# EAGLE board mb01-merge (EAGLE 7.7.0)
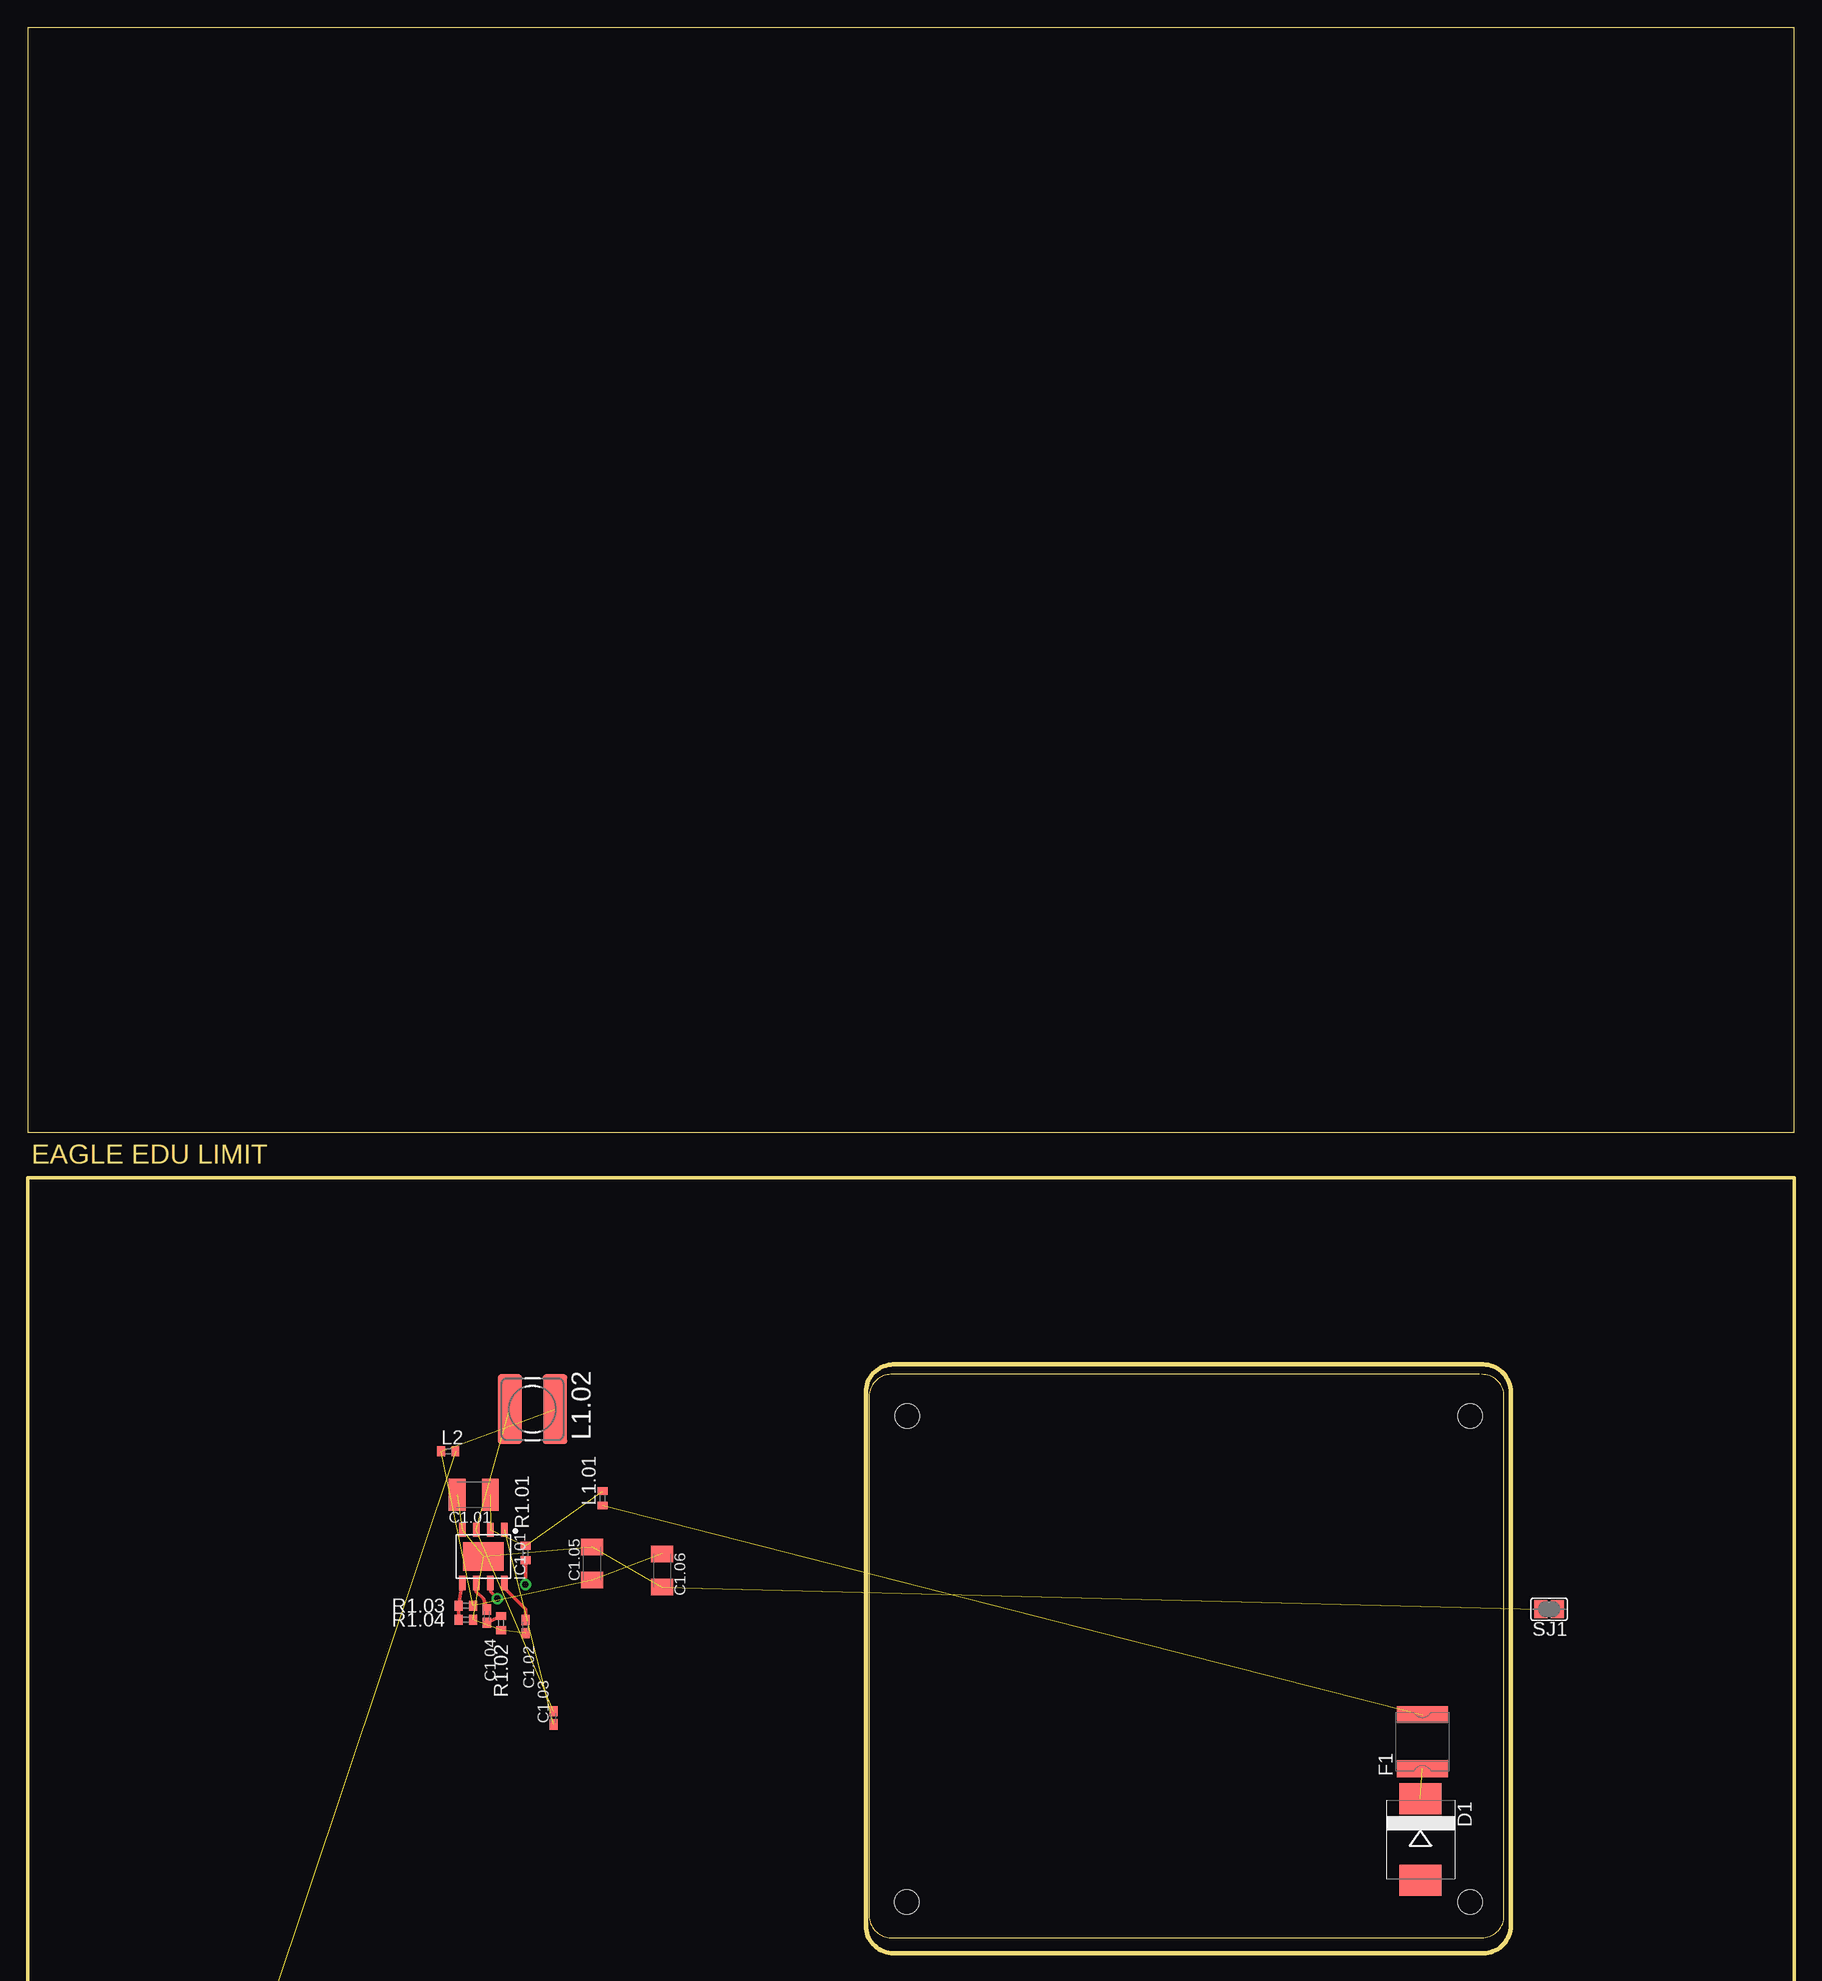
[diagram p0: board, top side]
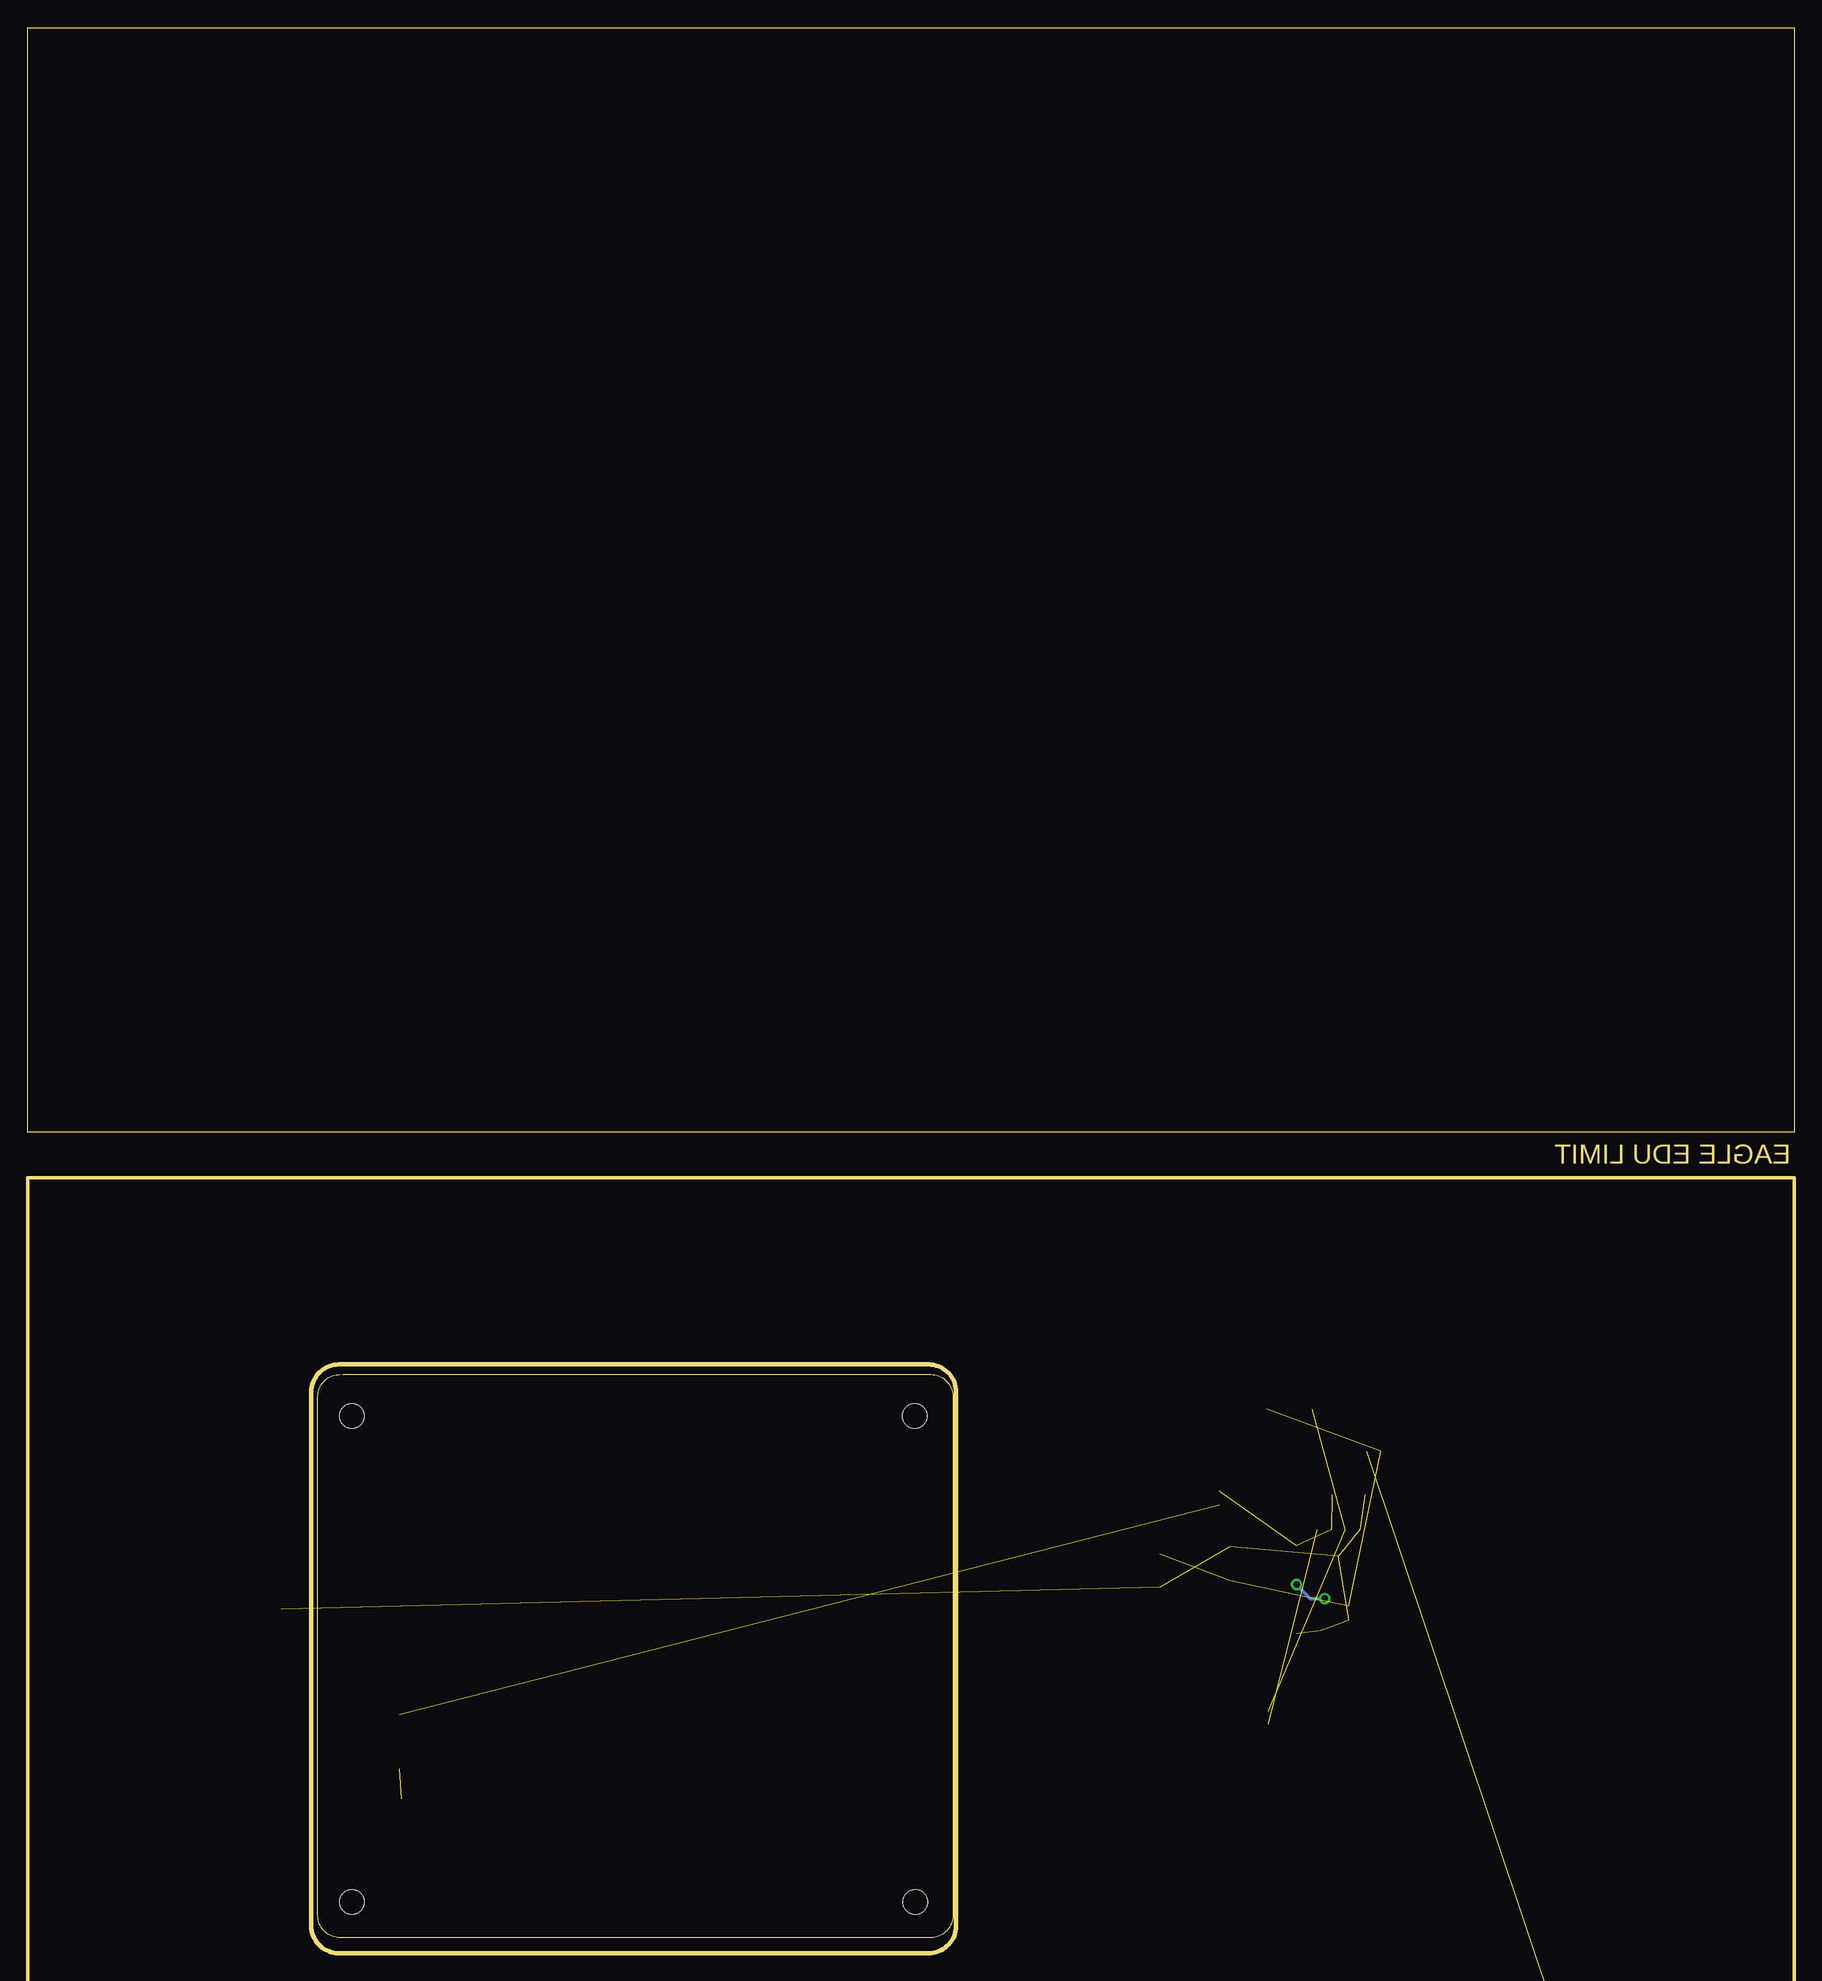
[diagram p1: board, bottom side, seen from below]

Size 160 x 174.33 mm. Coordinates in mm from the lower left corner, seen from the top.
Outline: 131.46,52.4 78.21,52.4 arc90 76.21,50.4 76.21,3.4 arc90 78.21,1.4 131.71,1.4 arc90 133.71,3.4 133.71,50.4 arc90 131.71,52.4
Outline: 78.41,53.3 arc90 75.91,50.8 75.91,2.5 arc90 78.41,0 131.81,0 arc90 134.31,2.5 134.31,50.8 arc90 131.81,53.3 78.31,53.3
Outline: 0,74.33 160,74.33 160,174.33 0,174.33 0,74.33
Copper layers (1*16): Top 0.035mm / dielectric 1.5mm / Bottom 0.035mm
Design rules "default": minimum track width 10mil, minimum drill 24mil, track to track 8mil, track to pad 8mil, pad to pad 8mil, via to via 8mil, smd to smd 8mil, copper to edge 40mil, drill to drill 8mil, minimum pad ring 10mil, minimum via ring 8mil, stop-mask expansion 4mil, vias tented up to drill 0mil, thermal gap 10mil
Holes 2.2 mm at 79.63,4.65 130.63,4.65 79.65,48.64 130.63,48.64
Milling: 4 lines

## Footprints (pad centres in the part's own frame; a part is rotated, then mirrored left to right if it is on the bottom)
C1210K = smd 1.5 x 2.9: 1 -1.5,0; 2 1.5,0
C0402K = smd 0.925 x 0.74: 1 -0.6,0; 2 0.6,0
C1206K = smd 1.5 x 2: 1 -1.5,0; 2 1.5,0
SMC = smd 2.8 x 3.8: A 3.7,0; C -3.7,0
MF-SMDF050 = smd 1.5 x 4.6: 1 -2.45,0; 2 2.45,0
SOIC-8-PAD = smd 1.27 x 0.6: 1 -2.4,1.905; 2 -2.4,0.635; 3 -2.4,-0.635; 4 -2.4,-1.905; 5 2.4,-1.905; 6 2.4,-0.635; 7 2.4,0.635; 8 2.4,1.905 | smd 2.55 x 3.7: PAD 0,0
0402 = smd 0.7 x 0.9: 1 -0.65,0; 2 0.65,0
POWER-CHOKE_WE-TPC = smd 6.3 x 2.2: 1 0,2.05; 2 0,-2.05
R0402 = smd 0.7 x 0.9: 1 -0.65,0; 2 0.65,0
SJ = smd 1.168 x 1.6: 1 -0.762,0; 2 0.762,0

## Placement (x,y rotation side)
C1.01  22uF/25V  [C1210K]  40.4,41.52 180 top
C1.02  100nF  [C0402K]  45.09,29.56 270 top
C1.03  100nF  [C0402K]  47.62,21.31 90 top
C1.04  XX  [C0402K]  41.59,30.52 270 top
C1.05  22uF/6.3V  [C1206K]  51.12,35.28 90 top
C1.06  22uF/6.3V  [C1206K]  57.47,34.64 270 top
D1  MBRS320T3  [SMC]  126.14,10.29 270 top
F1  750mA  [MF-SMDF050]  126.31,19.15 90 top
IC1.01  RT8293A  [SOIC-8-PAD]  41.27,35.91 270 top
L1.01  BEAD  [0402]  52.09,41.19 90 top
L1.02  4.7uH  [POWER-CHOKE_WE-TPC]  45.72,49.25 270 top
L2  BEAD  [0402]  38.1,45.44 0 top
R1.01  100kR  [R0402]  45.09,36.23 270 top
R1.02  XX  [R0402]  42.86,29.88 90 top
R1.03  XX  [R0402]  39.69,31.47 0 top
R1.04  XX  [R0402]  39.69,30.2 180 top
R1.05  [0R]  [R0402]  -25.4,-144.11 0 top  (outside the outline)
R1.06  [0R]  [R0402]  -25.4,-149.19 0 top  (outside the outline)
SJ1  [SJ]  137.78,31.14 180 top
U$1  [REF_GCB2_BS]  -82.87,7.02 0 top  (outside the outline)
U$2  [REF_GCB2_TS]  18.1,3.69 0 top

## Library data of the parts
C1.01-C1.06 L1.02 R1.01-R1.06 = rcl
D1 = diode
F1 = fuse
IC1.01 = kitt.ic
L1.01 L2 = inductors
SJ1 = jumper
U$1 U$2 = kitt.refs

## Nets
+5V: R1.05.1 R1.06.2
+12V: D1.C F1.1
GND: C1.01.2 C1.02.2 C1.05.2 C1.06.2 IC1.01.4 IC1.01.PAD R1.02.1 R1.04.1 SJ1.2
GNDA: SJ1.1
N$2: F1.2 L1.01.1
N$3: C1.01.1 IC1.01.2 L1.01.2 R1.01.1
N$4: IC1.01.7 R1.01.2
N$5: C1.02.1 IC1.01.8
N$7: C1.04.2 R1.02.2
N$25: C1.04.1 IC1.01.6
N$28: IC1.01.5 R1.03.1 R1.04.2
N$29: C1.05.1 C1.06.1 L1.02.1 L2.1 R1.03.2
N$30: C1.03.2 IC1.01.3 L1.02.2
N$31: C1.03.1 IC1.01.1
N$32: L2.2 R1.05.2 R1.06.1
VCC/2: D1.A

## Tracks (layer width: path | path; a pad name or v marks a point on that pad's centre or on a via)
+5V  (1 unrouted)
+12V  (1 unrouted)
GND  (8 unrouted)
N$2  (1 unrouted)
N$3  (3 unrouted)
N$4  (via drill 0.6)
  Top 0.305: IC1.01.7 41.91,32.74 v42.55,32.11 | v45.09,33.37 R1.01.2
  Bottom 0.305: v42.55,32.11 43.81,32.11 v45.09,33.37
N$5
  Top 0.305: IC1.01.8 43.36,32.88 45.09,31.15 C1.02.1
N$7
  Top 0.305: C1.04.2 R1.02.2
N$25
  Top 0.305: C1.04.1 41.27,32.11 40.64,32.74 IC1.01.6
N$28
  Top 0.305: R1.04.2 R1.03.1 39.35,33.5 IC1.01.5
  Top 0.406: IC1.01.5 39.35,33.51
N$29  (4 unrouted)
N$30  (2 unrouted)
N$31  (1 unrouted)
N$32  (2 unrouted)

## Text on the board
Milling: EAGLE EDU LIMIT
Reference: <-- Rail Power Leads | Motor Leads -->